# Altium PCB DifferentialProbe.PcbDoc (part 1 of 2)
Units mm, origin at the board's own origin, x right, y up, seen from the top; angles counter-clockwise.
Board outline 90 x 33 mm, 4 copper layers (Top Layer, Layer 1, Layer 2, Bottom Layer), stack 1.17 mm thick; 107 components, 44 nets, 239 pads, 207 vias.
Unrouted connection lines stored in the file: 3.
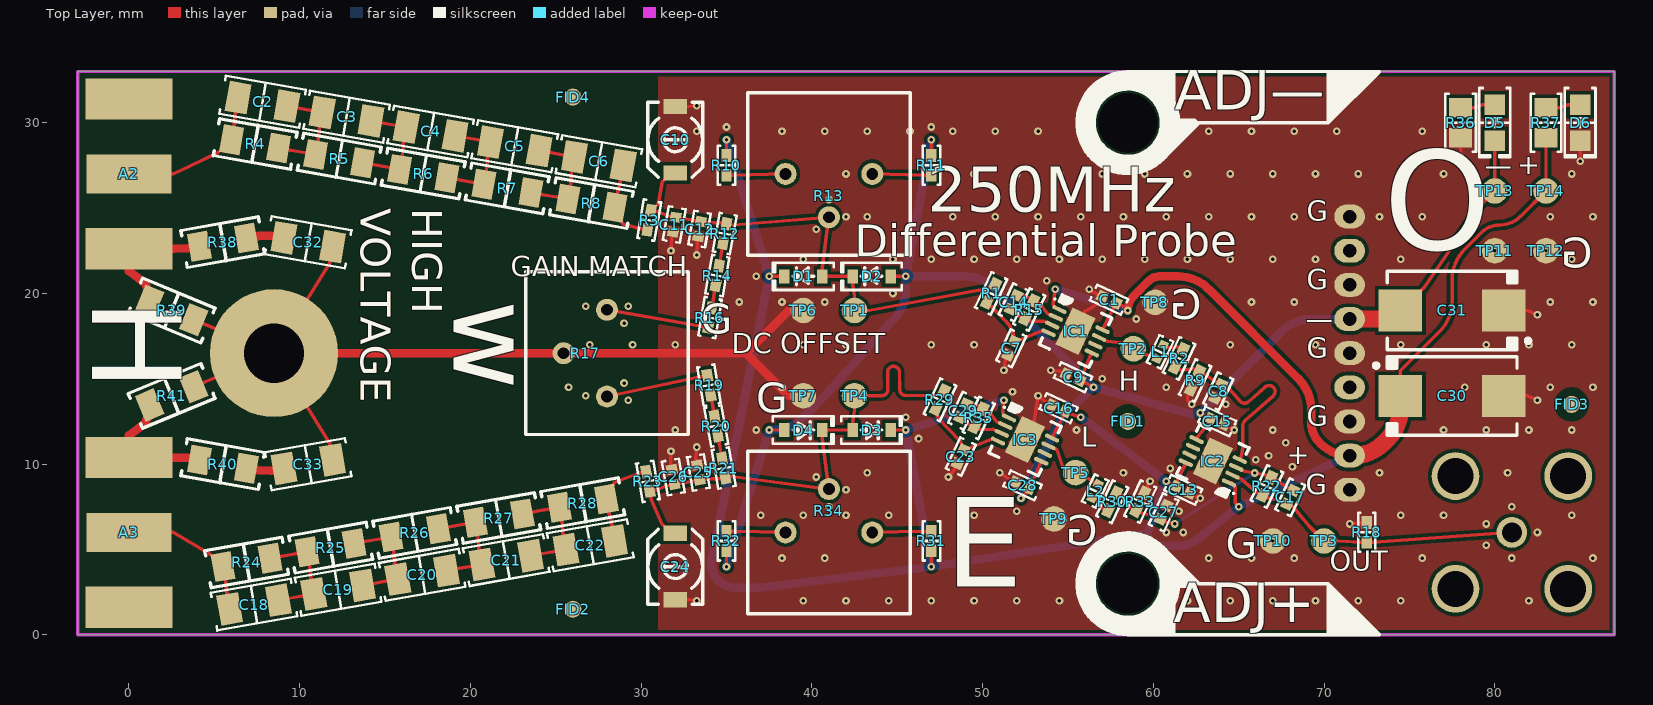
[diagram p0: Top Layer view]
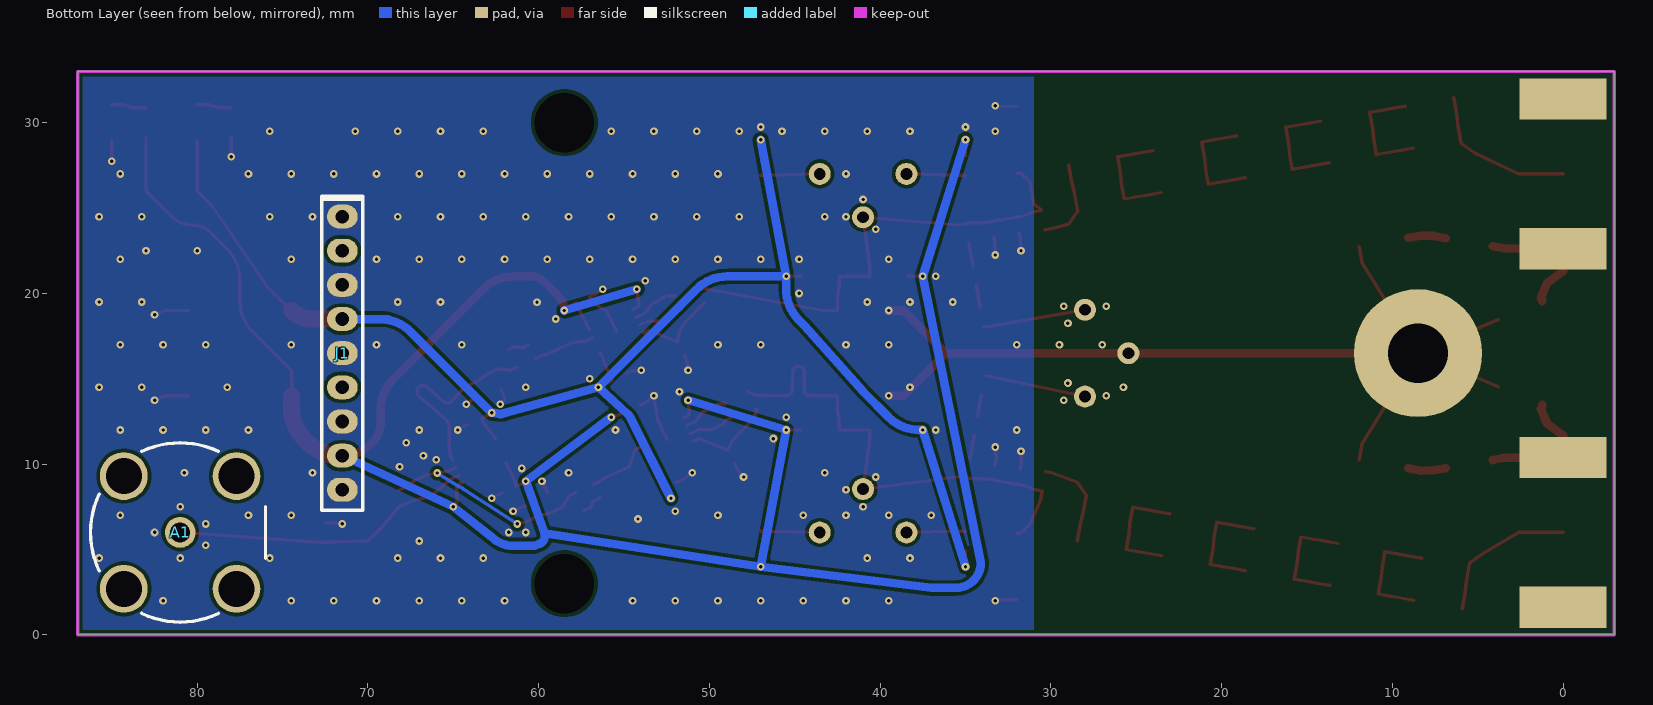
[diagram p1: Bottom Layer view, seen from below]
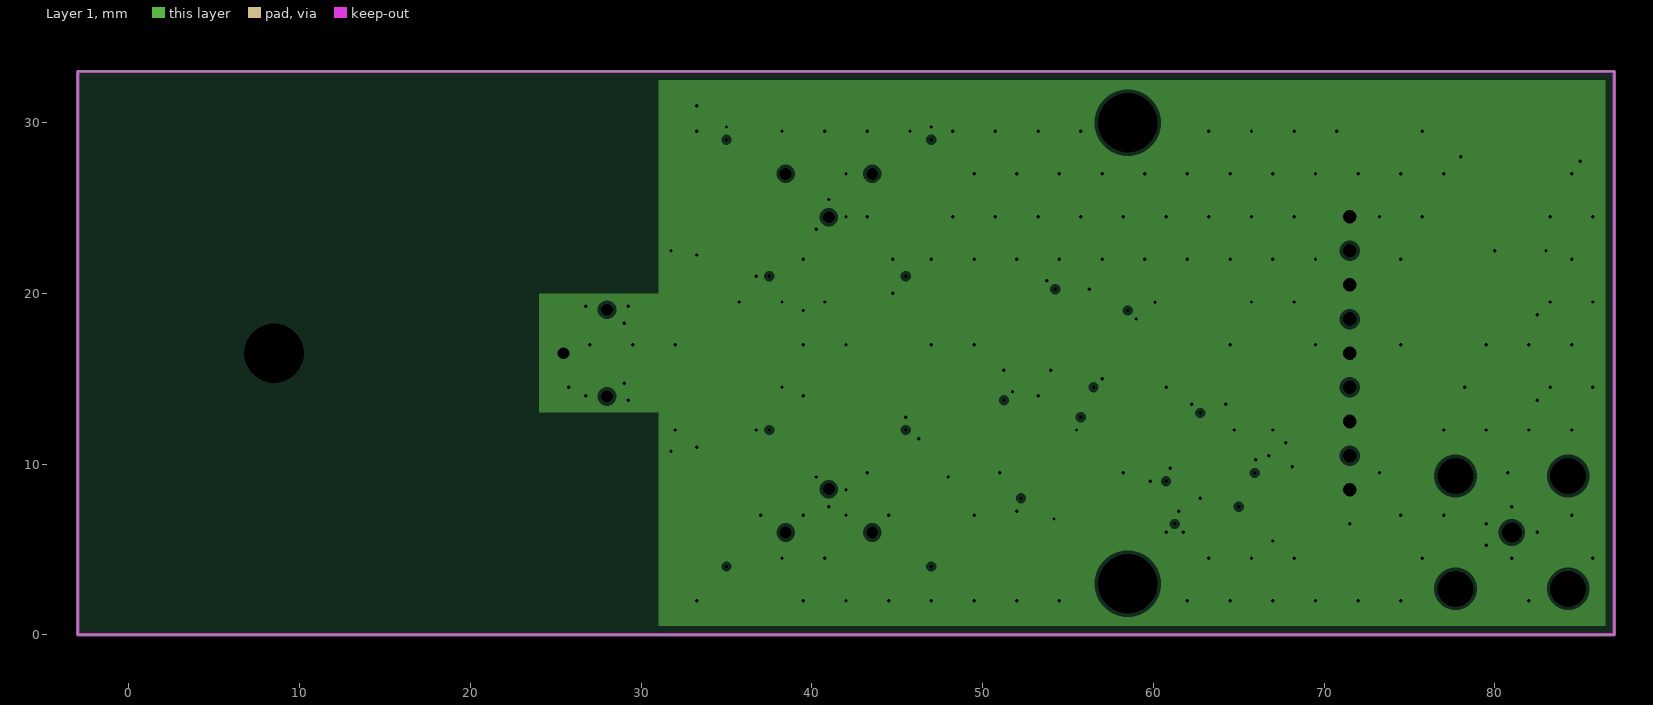
[diagram p2: Layer 1, clearances drawn from the general rule]
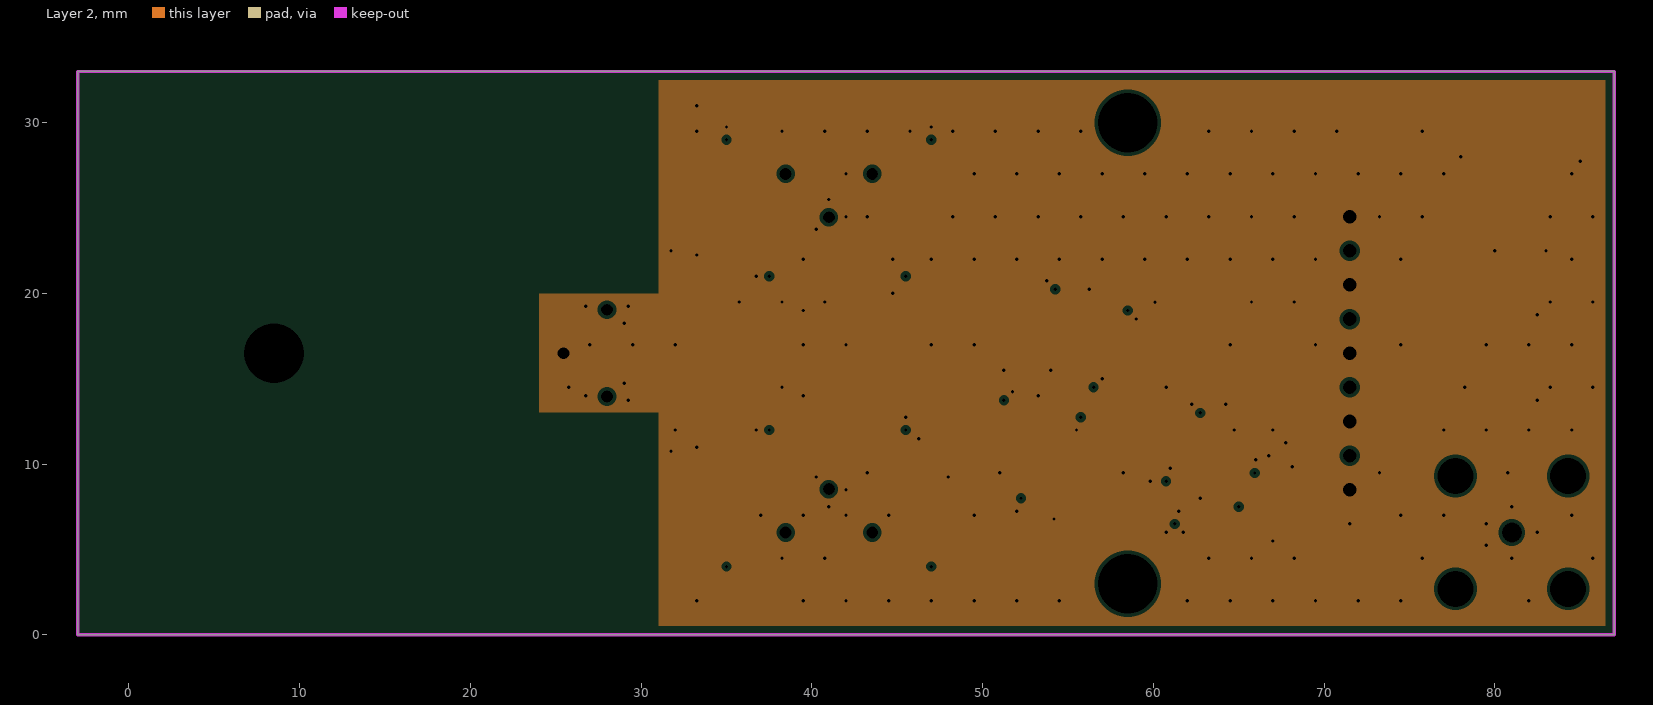
[diagram p3: Layer 2, clearances drawn from the general rule]

## Layer stack, top to bottom
Top Solder: solder mask 0.0102, Solder Resist, Dk 3.5
Top Layer: signal copper 0.035
Prepreg1: prepreg 0.2, PP-006, Dk 4.6
Layer 1: plane copper 0.0175, net GND
Core: dielectric 0.665, FR-4, Dk 4.6
Layer 2: plane copper 0.0175, net GND
Prepreg2: prepreg 0.2, PP-006, Dk 4.6
Bottom Layer: signal copper 0.035
Bottom Solder: solder mask 0.0102, Solder Resist, Dk 3.5

## Board outline
-3,0 87,0 87,33 -3,33

## Design rules (kind name [scope] priority, off if disabled: settings)
BoardOutlineClearance [All] p1: gap=0.25 ignorepadtopadclearanceinfootprint=FALSE
Clearance "Clearance GND Poly" [InPolygon] p1: gap=0.2 ignorepadtopadclearanceinfootprint=TRUE
Clearance [All] p2: gap=0.09 ignorepadtopadclearanceinfootprint=FALSE
HoleSize [All] p1: absolutevalues=TRUE maxlimit=5 minlimit=0.2 maxpercent=80.000 minpercent=20.000
MatchedLengths "MatchedLengths Output" [InNetClass('OutMatch')] p1: tolerance=25.4 checknetsindiffpair=FALSE checkdiffpairvsdiffpair=TRUE checkxsignals=TRUE checkothers=TRUE usedelayunits=TRUE delaytolerance=2.000000
MatchedLengths "MatchedLengths Input" [InNetClass('LengthMatch')] p2: tolerance=25.4 checknetsindiffpair=FALSE checkdiffpairvsdiffpair=TRUE checkxsignals=TRUE checkothers=TRUE usedelayunits=TRUE delaytolerance=2.000000
MinimumAnnularRing [All] p1: minimumring=0.125
MinimumSolderMaskSliver [All] p1: minsoldermaskwidth=0
PlaneClearance [All] p1: clearance=0.2
PlaneConnect [All] p1: planeconnectstyle=Direct reliefexpansion=0.508 reliefentries=4 reliefconductorwidth=0.254 reliefairgap=0.254
PolygonConnect [All] p1: connectstyle=Direct reliefconductorwidth=0.254 reliefentries=4 polygonreliefangle="90 Angle" airgapwidth=0.254
RoutingVias [All] p1: holewidth=0.35 width=0.65 viastyle="Through Hole" minholewidth=0.2 minwidth=0.45 maxholewidth=4 maxwidth=6.35
SMDEntry [All] p1: side=TRUE corner=TRUE anyangle=FALSE
SMDToCorner [All] p1: distance=39370
SilkToSilkClearance [All] p1: silktosilkclearance=-10
SolderMaskExpansion "SolderMask Via" [IsVia] p1: expansion=0.102 istentingtop=TRUE
SolderMaskExpansion [All] p2: expansion=0.102 istentingtop=FALSE
UnRoutedNet [All] p1: checkbadconnections=TRUE
Width [All] p1: maxlimit=3 minlimit=0.09 preferedwidth=0.2
24 further rules are at their usual default settings.

## Classes and differential pairs
net class OutMatch: NetC8_1 NetC17_1
net class LengthMatch: NetC10_1 NetC24_1
component class U_DifferentialProbe: C1 C2 C3 C4 C5 C6 C7 C8 C9 C10 C11 C12 C13 C14 C15 C16 C17 C18 C19 C20 C21 C22 C23 C24 C25 C26 C27 C28 C29 D1 D2 D3 D4 IC1 IC2 IC3 L1 L2 R1 R2 R3 R4 R5 R6 R7 R8 R9 R10 R11 R12 R13 R14 R15 R16 R17 R18 R19 R20 R21 R22 R23 R24 R25 R26 R27 R28 R29 R30 R31 R32 R33 R34 R35 TP1 TP2 TP3 TP4 TP5
component class "Probe Connections": A1 A2 A3 C30 C31 C32 C33 D5 D6 FID1 FID2 FID3 FID4 J1 R36 R37 R38 R39 R40 R41 TP6 TP7 TP8 TP9 TP10 TP11 TP12 TP13 TP14

## Components (designator, comment, footprint, x,y, rotation, side; value= is the part's Value field where it differs from the comment)
A1 "5413631-1" "TE 5413631-1" 81,6 r270 bottom
A2 "0732511290" "MOLEX SD-73251-129" -3,27 r180 top
A3 "0732511290" "MOLEX SD-73251-129" -3,6 r180 top
C1 "0.1 µF" "CAP 0402_1005" 57.41,19.628 r335 top
C2 "10 pF" "CAP 1206_3216 - 0.8MM" 7.826,31.221 r350 top
C3 "10 pF" "CAP 1206_3216 - 0.8MM" 12.75,30.353 r350 top
C4 "10 pF" "CAP 1206_3216 - 0.8MM" 17.674,29.485 r350 top
C5 "10 pF" "CAP 1206_3216 - 0.8MM" 22.598,28.617 r350 top
C6 "10 pF" "CAP 1206_3216 - 0.8MM" 27.522,27.748 r350 top
C7 "6.8pF" "CAP 0402_1005" 51.672,16.787 r65 top
C8 "0.8 pF" "CAP 0402_1005" 63.808,14.27 r245 top
C9 "0.1 µF" "CAP 0402_1005" 55.297,15.097 r155 top
C10 "JZ400" "KNOWLES JZ" 32,29 r90 top
C11 "470pF" "CAP 0402_1005" 31.946,24.03 r80 top
C12 "470pF" "CAP 0402_1005" 33.423,23.769 r80 top
C13 "0.1 µF" "CAP 0402_1005" 61.75,8.5 r155 top
C14 "0.25 pF" "CAP 0402_1005" 51.822,19.476 r65 top
C15 "0.1 µF" "CAP 0402_1005" 63.75,12.5 r335 top
C16 "0.1 µF" "CAP 0402_1005" 54.452,13.284 r335 top
C17 "0.8 pF" "CAP 0402_1005" 68.016,8.063 r245 top
C18 "10 pF" "CAP 1206_3216 - 0.8MM" 7.326,1.779 r10 top
C19 "10 pF" "CAP 1206_3216 - 0.8MM" 12.25,2.647 r10 top
C20 "10 pF" "CAP 1206_3216 - 0.8MM" 17.174,3.515 r10 top
C21 "10 pF" "CAP 1206_3216 - 0.8MM" 22.098,4.383 r10 top
C22 "10 pF" "CAP 1206_3216 - 0.8MM" 27.022,5.252 r10 top
C23 "6.8pF" "CAP 0402_1005" 48.714,10.443 r65 top
C24 "JZ400" "KNOWLES JZ" 32,4 r270 top
C25 "470pF" "CAP 0402_1005" 33.355,9.512 r280 top
C26 "470pF" "CAP 0402_1005" 31.877,9.252 r280 top
C27 "0.8 pF" "CAP 0402_1005" 60.599,7.176 r65 top
C28 "0.1 µF" "CAP 0402_1005" 52.339,8.753 r155 top
C29 "0.25 pF" "CAP 0402_1005" 48.864,13.131 r65 top
C30 "470µF" "CAP POL 2917_7343" 77.5,14 r0 top
C31 "470µF" "CAP POL 2917_7343" 77.5,19 r180 top
C32 "10pF" "CAP 1206_3216 - 1.0MM" 10.5,23 r170 top
C33 "10pF" "CAP 1206_3216 - 1.0MM" 10.5,10 r190 top
D1 "BAS316,115" SOD323 39.5,21 r180 top
D2 "BAS316,115" SOD323 43.5,21 r180 top
D3 "BAS316,115" SOD323 43.5,12 r0 top
D4 "BAS316,115" SOD323 39.5,12 r0 top
D5 "Green" "LED 0805_2012 GREEN" 80,30 r270 top
D6 "Green" "LED 0805_2012 GREEN" 85,30 r270 top
FID1 "Fiducial" Fiducial-1mm 58.5,12.5 r65 top
FID2 "Fiducial" Fiducial-1mm 26,1.5 r90 top
FID3 "Fiducial" Fiducial-1mm 84.5,13.5 r90 top
FID4 "Fiducial" Fiducial-1mm 26,31.5 r90 top
IC1 "ADA4817-1ACPZ-R7" "AD LFCSP-8 3x3MM CP-8-5" 55.448,17.785 r335 top
IC2 "ADA4817-1ACPZ-R7" "AD LFCSP-8 3x3MM CP-8-5" 63.485,10.176 r155 top
IC3 "ADA4817-1ACPZ-R7" "AD LFCSP-8 3x3MM CP-8-5" 52.489,11.441 r335 top
J1 "NRPN091PAEN-RC" "SULLINS NRPN091PAEN-RC" 71.5,16.5 r270 bottom
L1 "22 nH" "IND 0402_1005 RF WW" 60.402,16.578 r65 top
L2 "22 nH" "IND 0402_1005 RF WW" 56.598,8.422 r245 top
R1 "150 Ohms" "RES 0402_1005" 50.5,20 r245 top
R2 "348 Ohms" "RES 0402_1005" 61.511,16.194 r245 top
R3 "150 Ohms" "RES 0402_1005" 30.469,24.29 r80 top
R4 "1 MOhms" "RES 1206_3216" 7.391,28.759 r350 top
R5 "1 MOhms" "RES 1206_3216" 12.315,27.891 r350 top
R6 "1 MOhms" "RES 1206_3216" 17.24,27.023 r350 top
R7 "1 MOhms" "RES 1206_3216" 22.164,26.155 r350 top
R8 "1 MOhms" "RES 1206_3216" 27.088,25.286 r350 top
R9 "348 Ohms" "RES 0402_1005" 62.448,14.904 r245 top
R10 "15 kOhms" "RES 0402_1005" 35,27.5 r270 top
R11 "15 kOhms" "RES 0402_1005" 47,27.5 r90 top
R12 "9.1 kOhms" "RES 0402_1005" 34.9,23.509 r80 top
R13 "1 MOhms" "BOURNS TRIMPOT 3386P-1" 41,27 r0 top
R14 "845 Ohms" "RES 0402_1005" 34.466,21.047 r80 top
R15 "470 Ohms" "RES 0402_1005" 52.729,19.053 r65 top
R16 "24.9 Ohms" "RES 0402_1005" 34.032,18.585 r80 top
R17 "100 Ohms" "BOURNS TRIMPOT 3386P-1" 28,16.5 r270 top
R18 "1 kOhms" "RES 0402_1005" 72.5,6 r270 top
R19 "24.9 Ohms" "RES 0402_1005" 33.977,14.623 r280 top
R20 "845 Ohms" "RES 0402_1005" 34.398,12.235 r280 top
R21 "9.1 kOhms" "RES 0402_1005" 34.832,9.773 r280 top
R22 "348 Ohms" "RES 0402_1005" 66.657,8.696 r245 top
R23 "150 Ohms" "RES 0402_1005" 30.4,8.991 r280 top
R24 "1 MOhms" "RES 1206_3216" 6.891,4.241 r10 top
R25 "1 MOhms" "RES 1206_3216" 11.815,5.109 r10 top
R26 "1 MOhms" "RES 1206_3216" 16.74,5.977 r10 top
R27 "1 MOhms" "RES 1206_3216" 21.664,6.845 r10 top
R28 "1 MOhms" "RES 1206_3216" 26.588,7.714 r10 top
R29 "150 Ohms" "RES 0402_1005" 47.505,13.765 r245 top
R30 "348 Ohms" "RES 0402_1005" 57.591,7.802 r65 top
R31 "15 kOhms" "RES 0402_1005" 47,5.5 r90 top
R32 "15 kOhms" "RES 0402_1005" 35,5.5 r270 top
R33 "348 Ohms" "RES 0402_1005" 59.24,7.81 r65 top
R34 "1 MOhms" "BOURNS TRIMPOT 3386P-1" 41,6 r180 top
R35 "470 Ohms" "RES 0402_1005" 49.77,12.709 r65 top
R36 "390 Ohms" "RES 0805_2012" 78,30 r270 top
R37 "390 Ohms" "RES 0805_2012" 83,30 r270 top
R38 "0 Ohms" "RES 1206_3216" 5.5,23 r190 top
R39 "0 Ohms" "RES 1206_3216" 2.5,19 r157.5 top
R40 "0 Ohms" "RES 1206_3216" 5.5,10 r170 top
R41 "0 Ohms" "RES 1206_3216" 2.5,14 r202.5 top
TP1 "Test Point" TestPoint-1.5mm 42.5,19 r0 top
TP2 "Test Point" TestPoint-1.5mm 58.831,16.759 r65 top
TP3 "Test Point" TestPoint-1.5mm 70,5.5 r65 top
TP4 "Test Point" TestPoint-1.5mm 42.5,14 r90 top
TP5 "Test Point" TestPoint-1.5mm 55.45,9.509 r65 top
TP6 "Test Point" TestPoint-1.5mm 39.5,19 r90 top
TP7 "Test Point" TestPoint-1.5mm 39.5,14 r90 top
TP8 "Test Point" TestPoint-1.5mm 60.099,19.478 r65 top
TP9 "Test Point" TestPoint-1.5mm 54.182,6.79 r65 top
TP10 "Test Point" TestPoint-1.5mm 67,5.5 r0 top
TP11 "Test Point" TestPoint-1.5mm 80,22.5 r90 top
TP12 "Test Point" TestPoint-1.5mm 83,22.5 r90 top
TP13 "Test Point" TestPoint-1.5mm 80,26 r90 top
TP14 "Test Point" TestPoint-1.5mm 83,26 r90 top

## Footprints (in the part's own frame and the unit in brackets; to place one, negate y for a bottom-side part, rotate by r counter-clockwise, add the part's x,y. Pads: shape width x height; smd on the part's side, far side on the other; paste and mask are expansions set on the pad)
"AD LFCSP-8 3x3MM CP-8-5" [mm] "SON, 8-Leads, Body 3.00x3.00mm, Pitch 0.50mm, Thermal Pad 2.36x1.49mm, IPC Medium Density"
  oval 0.9x0.25 smd: 1(-1.395,0.75) 2(-1.395,0.25) 3(-1.395,-0.25) 4(-1.395,-0.75) 5(1.395,-0.75) 6(1.395,-0.25) 7(1.395,0.25) 8(1.395,0.75)
  rect 1.49x2.36 smd: 9(0,0)
  silkscreen extent -1.95,-1.6 1.6,1.6, body extent -1.57,-1.55 1.57,1.55, height 0.8
"BOURNS TRIMPOT 3386P-1" [mm] "3386 - 3/8 ? Square Trimpot® Trimming Potentiometer"
  round 1.29 hole 0.69: 1(-2.54,0) 2(0,-2.54) 3(2.54,0)
  silkscreen extent -4.76,-4.76 4.76,4.76, body extent -4.79,-4.79 4.79,4.79, height 4.95
"CAP 0402_1005" [mm] "Chip Capacitor, 2-Leads, Body 1.02x0.51mm, IPC Medium Density"
  rect 0.6x0.64 smd: 1(-0.44,0) 2(0.44,0)
  silkscreen extent -1,-0.5 1,0.5, body extent -0.5,-0.26 0.5,0.26, height 0.52
"CAP 1206_3216 - 0.8MM" [mm] "Chip Capacitor, 2-Leads, Body 3.25x1.60mm, IPC Medium Density"
  rect 1.3x1.8 smd: 1(-1.45,0) 2(1.45,0)
  silkscreen extent -2.37,-1.13 2.38,1.12, body extent -1.6,-0.8 1.6,0.8, height 0.8
"CAP 1206_3216 - 1.0MM" [mm] "Chip Capacitor, 2-Leads, Body 3.25x1.60mm, IPC Medium Density"
  rect 1.3x1.8 smd: 1(-1.45,0) 2(1.45,0)
  silkscreen extent -2.38,-1.13 2.37,1.13, body extent -1.6,-0.8 1.6,0.8, height 1
"CAP POL 2917_7343" [mm] "Molded Capacitor, 2-Leads, Body 7.30x4.30mm, IPC Medium Density"
  rect 2.55x2.45 smd: 1(-3.025,0) 2(3.025,0)
  silkscreen extent -4.57,-2.3 3.8,2.3, body extent -3.65,-2.15 3.65,2.15, height 4.1
Fiducial-1mm [mm]
  round 1 smd paste-1 mask+0.5: F(0,0)
  Top Layer pour cut-out: -1,0 -0.924,0.383 -0.707,0.707 -0.383,0.924 0,1 0,1 0.383,0.924 0.707,0.707 0.924,0.383 1,0 1,0 0.924,-0.383 0.707,-0.707 0.383,-0.924 0,-1 0,-1 -0.383,-0.924 -0.707,-0.707 -0.924,-0.383 -1,0
"IND 0402_1005 RF WW" [mm] "Chip Inductor, 2-Leads, Body 1.00x0.50mm, IPC High Density"
  rect 0.48x0.54 smd: 1(-0.44,0) 2(0.44,0)
  silkscreen extent -0.88,-0.45 0.88,0.45, body extent -0.5,-0.29 0.5,0.29, height 0.51
"KNOWLES JZ" [mm] "CAP TRIMMER"
  rect 0.9x1.4 smd: 1(-1.95,0) 2(1.95,0)
  silkscreen extent -2.2,-1.6 2.2,1.6, body extent -2.25,-1.6 2.25,1.6, height 1.45
"LED 0805_2012 GREEN" [mm] "Chip Diode, 2-Leads, Body 2.00x1.25mm, IPC Medium Density"
  rect 1.2x1.2 smd: 1(-1.05,0) 2(1.05,0)
  silkscreen extent -2.03,-0.9 2.03,0.9, body extent -1,-0.62 1,0.63, height 0.9
"MOLEX SD-73251-129" [mm]
  rect 5.08x2.415 smd: G(-3,4.383) G(-3,-4.383)
  rect 5.08x2.415 smd far side: G(-3,4.383) G(-3,-4.383)
  rect 5x2.29 smd: S(-3,0)
  body extent -4.75,-4.76 12.7,4.77, height 4.36
"RES 0402_1005" [mm] "Chip Resistor, 2-Leads, Body 1.0x0.5mm, IPC Medium Density"
  rect 0.75x0.6 smd: 1(-0.575,0) 2(0.575,0)
  silkscreen extent -1.14,-0.51 1.14,0.51, body extent -0.5,-0.25 0.5,0.25, height 0.35
"RES 0805_2012" [mm] "Chip Resistor, 2-Leads, Body 2.00x1.25mm, IPC Medium Density"
  rect 1.15x1.35 smd: 1(-0.875,0) 2(0.875,0)
  silkscreen extent -1.7,-0.9 1.7,0.9, body extent -1,-0.62 1,0.63, height 0.6
"RES 1206_3216" [mm] "Chip Resistor, 2-Leads, Body 3.13x1.55mm, IPC Medium Density"
  rect 1.2x1.65 smd: 1(-1.4,0) 2(1.4,0)
  silkscreen extent -2.3,-1.1 2.3,1.1, body extent -1.6,-0.8 1.6,0.8, height 0.6
SOD323 [mm] "SOD, 2-Leads, Body 1.25x2.50mm, IPC Medium Density"
  rect 0.625x0.83 smd: 1(-1.112,0) 2(1.112,0)
  silkscreen extent -1.78,-0.8 1.78,0.8, body extent -1.36,-0.62 1.36,0.62, height 1.05
"SULLINS NRPN091PAEN-RC" [mm]
  oval 1.4x1.8 hole 0.8: 1(-8,0) 2(-6,0) 3(-4,0) 4(-2,0) 5(0,0) 6(2,0) 7(4,0) 8(6,0) 9(8,0)
  silkscreen extent -9.2,-1.2 9.2,1.2, body extent -9,-1 9,1, height 5.6
"TE 5413631-1" [mm] "CONN BNC JACK R/A 50 OHM PCB"
  round 2.8 hole 2.11: G(-3.3,-3.3) G(-3.3,3.3) G(3.3,-3.3) G(3.3,3.3)
  round 1.8 hole 1.17: S(0,0)
  silkscreen extent -5.25,-5.25 5.25,5, body extent -5.26,-22.63 5.26,5, height 11.66
TestPoint-1.5mm [mm]
  round 1.5 smd: 1(0,0)

## Part data
A1: "CONN BNC JACK R/A 50 OHM PCB", Frequency - Max="4 GHz", Housing Color=Silver, Manufacturer="TE Connectivity AMP Connectors", Supplier Part Number 1=A32270-ND, ComponentLink1Description=Datasheet, ComponentLink1URL=https://www.te.com/commerce/DocumentDelivery/DDEController?Action=srchrtrv&DocNm=1307191_BNC_Connectors&DocType=CS&DocLang=English, ComponentLink2Description="DigiKey Link", ComponentLink2URL=https://www.digikey.com/en/products/detail/te-connectivity-amp-connectors/5413631-1/811168, Connector Style=BNC, Connector Type="Jack, Female Socket", Contact Termination=Solder, Fastening Type="Bayonet Lock", Impedance=50Ohm, LastUpdated="29/06/2022 18:00:52", Lifecycle Status=Active, Minimum Order=1, Mounting Type="Through Hole, Right Angle", Number of Ports=1, Packaging=Bulk, Part Number=5413631-1, Part Status=Active, Price=5.77, Series=-, Shield Termination=Solder, Supplier 1=DigiKey
A2 A3: "CONN SMA JACK STR 50OHM EDGE MNT", Frequency - Max="18 GHz", Housing Color=Gold, Manufacturer=Molex, Supplier Part Number 1=WM9461-ND, ComponentLink1Description=Datasheet, ComponentLink1URL=https://www.molex.com/pdm_docs/ps/PS-89675-346.pdf, ComponentLink2Description="DigiKey Link", ComponentLink2URL=https://www.digikey.com/en/products/detail/molex/0732511290/3878247, Connector Style=SMA, Connector Type="Jack, Female Socket", Contact Termination=Solder, Fastening Type=Threaded, Impedance=50Ohm, LastUpdated="29/06/2022 18:07:55", Lifecycle Status=Active, Minimum Order=1, Mounting Feature="Bulkhead - Front Side Nut", Mounting Type="Board Edge, End Launch; Panel Mount", Number of Ports=1, Packaging=Tray, Part Number=0732511290, Part Status=Active, Price=4.46, Series=73251, Shield Termination=Solder, Supplier 1=DigiKey
C1 C9 C13 C15 C16 C28: library part 0402B104K100CT, "CAP CER 0.1UF 10V X7R 0402", Device Package="0402 (1005 Metric)", Manufacturer="Walsin Technology Corporation", Operating Temperature="-55°C ~ 125°C", Supplier Part Number 1=1292-1629-1-ND, Temperature Coefficient=X7R, Tolerance=±10%, Voltage - Rated=10V, Applications="General Purpose", Capacitance="0.1 µF", ComponentLink1Description=Datasheet, ComponentLink1URL=http://www.passivecomponent.com/wp-content/uploads/2018/10/MLCC.pdf, ComponentLink2Description="DigiKey Link", ComponentLink2URL=https://www.digikey.com/en/products/detail/walsin-technology-corporation/0402B104K100CT/6707533, LastUpdated="28/06/2022 16:55:03", Lifecycle Status=Active, Minimum Order=1, Mounting Type="Surface Mount, MLCC", Package / Case="0402 (1005 Metric)", Packaging=TapeAndReel, Part Number=0402B104K100CT, Part Status=Active, PartId=38949, Price=0.01, Series=-, Size / Dimension="0.039\" L x 0.020\" W (1.00mm x 0.50mm)", Supplier 1=DigiKey, Thickness (Max)="0.022\" (0.55mm)"
C2 C3 C4 C5 C6 C18 C19 C20 C21 C22: library part CC1206JRNPOBBN100, "CAP CER 10PF 500V C0G/NPO 1206", Device Package="1206 (3216 Metric)", Manufacturer=Yageo, Operating Temperature="-55°C ~ 125°C", Supplier Part Number 1=311-4431-1-ND, Temperature Coefficient="C0G, NP0", Tolerance=±5%, Voltage - Rated=500V, Applications="General Purpose", Capacitance="10 pF", ComponentLink1Description=Datasheet, ComponentLink1URL=http://www.yageo.com/documents/recent/UPY-NP0X7R_MV_100-to-630V_21.pdf, ComponentLink2Description="DigiKey Link", ComponentLink2URL=https://www.digikey.com/en/products/detail/yageo/CC1206JRNPOBBN100/5884499, LastUpdated="27/06/2022 11:07:55", Lifecycle Status=Active, Minimum Order=1, Mounting Type="Surface Mount, MLCC", Package / Case="1206 (3216 Metric)", Packaging=TapeAndReel, Part Number=CC1206JRNPOBBN100, Part Status=Active, PartId=18815, Price=0.04, Series=CC, Size / Dimension="0.126\" L x 0.063\" W (3.20mm x 1.60mm)", Supplier 1=DigiKey, Thickness (Max)="0.028\" (0.70mm)"
C7 C23: library part 04025U6R8BAT2A, "CAP CER 6.8PF 50V NP0 0402", Device Package="0402 (1005 Metric)", Manufacturer="AVX Corporation", Operating Temperature="-55°C ~ 125°C", Supplier Part Number 1=478-10165-1-ND, Temperature Coefficient="C0G, NP0", Tolerance=±0.1pF, Voltage - Rated=50V, Applications="RF, Microwave, High Frequency", Capacitance=6.8pF, ComponentLink1Description=Datasheet, ComponentLink1URL=http://datasheets.avx.com/U-Series.pdf, ComponentLink2Description="DigiKey Link", ComponentLink2URL=http://digikey.com/product-detail/en/avx-corporation/04025U6R8BAT2A/478-10165-1-ND/6797183, Features="Ultra Low ESR", LastUpdated="08/02/2022 12:26:50", Lifecycle Status=Active, Minimum Order=1, Mounting Type="Surface Mount, MLCC", Package / Case="0402 (1005 Metric)", Packaging=TapeAndReel, Part Number=04025U6R8BAT2A, Part Status=Active, PartId=6872, Price=0.03, Series=U, Size / Dimension="0.039\" L x 0.020\" W (1.00mm x 0.50mm)", Supplier 1=DigiKey, Thickness (Max)="0.022\" (0.55mm)"
C8 C27: library part CBR04C808C5GAC, "CAP CER 0.8PF 50V C0G/NP0 0402", Device Package="0402 (1005 Metric)", Manufacturer=KEMET, Operating Temperature="-55°C ~ 125°C", Supplier Part Number 1=399-6160-1-ND, Temperature Coefficient="C0G, NP0", Tolerance=±0.25pF, Voltage - Rated=50V, Applications="RF, Microwave, High Frequency", Capacitance="0.8 pF", ComponentLink1Description=Datasheet, ComponentLink1URL=https://api.kemet.com/component-edge/download/datasheet/CBR04C808C5GAC.pdf, ComponentLink2Description="DigiKey Link", ComponentLink2URL=https://www.digikey.com/en/products/detail/kemet/CBR04C808C5GAC/2732303, Features="High Q, Low Loss, Ultra Low ESR", LastUpdated="28/06/2022 16:55:23", Lifecycle Status=Active, Minimum Order=1, Mounting Type="Surface Mount, MLCC", Package / Case="0402 (1005 Metric)", Packaging=TapeAndReel, Part Number=CBR04C808C5GAC, Part Status=Active, PartId=39017, Price=0.01, Series="CBR-SMD RF C0G", Size / Dimension="0.039\" L x 0.020\" W (1.00mm x 0.50mm)", Supplier 1=DigiKey, Thickness (Max)="0.022\" (0.55mm)"
C10 C24: "CAP TRIMMER 8-40PF 125V SMD", Capacitance Range="8 ~ 40pF", Dielectric Material=Ceramic, Manufacturer="Knowles Voltronics", Operating Temperature="-40°C ~ 85°C", Q @ Freq="1500 @ 1MHz", Supplier Part Number 1=1674-1006-1-ND, Adjustment Type=Top, ComponentLink1Description=Datasheet, ComponentLink1URL=https://www.knowlescapacitors.com/getattachment/4e3ef37f-1910-4b01-89e4-302e57c70f90/JZ-Series.aspx, ComponentLink2Description="DigiKey Link", ComponentLink2URL=https://www.digikey.com/en/products/detail/knowles-voltronics/JZ400/6021623, Features="General Purpose", Height - Seated (Max)="0.057\" (1.45mm)", LastUpdated="29/06/2022 15:30:24", Lifecycle Status=Active, Minimum Order=1, Mounting Type="Surface Mount", Packaging=TapeAndReel, Part Number=JZ400, Part Status=Active, Price=1.51, Series=JZ, Size / Dimension="0.177\" L x 0.126\" W (4.50mm x 3.20mm)", Supplier 1=DigiKey
C11 C12 C25 C26: library part 04025A471JAT2A, "CAP CER 470PF 50V C0G/NP0 0402", Device Package="0402 (1005 Metric)", Manufacturer="AVX Corporation", Operating Temperature="-55°C ~ 125°C", Supplier Part Number 1=478-7880-1-ND, Temperature Coefficient="C0G, NP0", Tolerance=±5%, Voltage - Rated=50V, Applications="General Purpose", Capacitance=470pF, ComponentLink1Description=Datasheet, ComponentLink1URL=http://datasheets.avx.com/C0GNP0-Dielectric.pdf, ComponentLink2Description="DigiKey Link", ComponentLink2URL=http://digikey.com/product-detail/en/avx-corporation/04025A471JAT2A/478-7880-1-ND/3881503, LastUpdated="08/02/2022 12:26:47", Lifecycle Status=Active, Minimum Order=1, Mounting Type="Surface Mount, MLCC", Package / Case="0402 (1005 Metric)", Packaging=TapeAndReel, Part Number=04025A471JAT2A, Part Status=Active, PartId=8853, Price=0.01, Series=-, Size / Dimension="0.039\" L x 0.020\" W (1.00mm x 0.50mm)", Supplier 1=DigiKey, Thickness (Max)="0.022\" (0.55mm)"
C14 C29: library part GCQ1555C1HR25BB01D, "CAP CER 0.25PF 50V C0G/NP0 0402", Device Package="0402 (1005 Metric)", Manufacturer="Murata Electronics", Operating Temperature="-55°C ~ 125°C", Ratings=AEC-Q200, Supplier Part Number 1=490-17543-1-ND, Temperature Coefficient="C0G, NP0", Tolerance=±0.1pF, Voltage - Rated=50V, Applications="RF, Microwave, High Frequency, Automotive", Capacitance="0.25 pF", ComponentLink1Description=Datasheet, ComponentLink1URL=https://search.murata.co.jp/Ceramy/image/img/A01X/G101/ENG/GCQ1555C1HR25BB01-01.pdf, ComponentLink2Description="DigiKey Link", ComponentLink2URL=https://www.digikey.com/en/products/detail/murata-electronics/GCQ1555C1HR25BB01D/7803249, LastUpdated="28/06/2022 16:54:55", Lifecycle Status=Active, Minimum Order=1, Mounting Type="Surface Mount, MLCC", Package / Case="0402 (1005 Metric)", Packaging=TapeAndReel, Part Number=GCQ1555C1HR25BB01D, Part Status=Active, PartId=13204, Price=0.05, Series=GCQ, Size / Dimension="0.039\" L x 0.020\" W (1.00mm x 0.50mm)", Supplier 1=DigiKey, Thickness (Max)="0.022\" (0.55mm)"
C17: library part CC0402BRNPO9BNR80, "CAP CER 0.8PF 50V C0G/NPO 0402", Device Package="0402 (1005 Metric)", Manufacturer=Yageo, Operating Temperature="-55°C ~ 125°C", Supplier Part Number 1=311-3711-1-ND, Temperature Coefficient="C0G, NP0", Tolerance=±0.1pF, Voltage - Rated=50V, Applications="General Purpose", Capacitance="0.8 pF", ComponentLink1Description=Datasheet, ComponentLink1URL=https://www.yageo.com/upload/media/product/productsearch/datasheet/mlcc/UPY-GP_NP0_16V-to-50V_17.pdf, ComponentLink2Description="DigiKey Link", ComponentLink2URL=https://www.digikey.com/en/products/detail/yageo/CC0402BRNPO9BNR80/5883200, LastUpdated="28/06/2022 16:55:12", Lifecycle Status=Active, Minimum Order=1, Mounting Type="Surface Mount, MLCC", Package / Case="0402 (1005 Metric)", Packaging=TapeAndReel, Part Number=CC0402BRNPO9BNR80, Part Status=Active, PartId=8101, Price=0.01, Series=CC, Size / Dimension="0.039\" L x 0.020\" W (1.00mm x 0.50mm)", Supplier 1=DigiKey, Thickness (Max)="0.022\" (0.55mm)"
C30 C31: library part TPSE477K010R0100, "CAP TANT 470UF 10% 10V 2917", Device Package="2917 (7343 Metric)", ESR (Equivalent Series Resistance)=100mOhm, Manufacturer="AVX Corporation", Manufacturer Size Code=E, Operating Temperature="-55°C ~ 125°C", Supplier Part Number 1=478-1807-1-ND, Tolerance=±10%, Voltage - Rated=10V, Capacitance=470µF, ComponentLink1Description=Datasheet, ComponentLink1URL=http://datasheets.avx.com/TPS.pdf, ComponentLink2Description="DigiKey Link", ComponentLink2URL=http://digikey.com/product-detail/en/avx-corporation/TPSE477K010R0100/478-1807-1-ND/564839, Features="General Purpose", Height - Seated (Max)="0.169\" (4.30mm)", LastUpdated="02/09/2020 01:16:18", Lifecycle Status=Active, Minimum Order=1, Mounting Type="Surface Mount", Package / Case="2917 (7343 Metric)", Packaging=TapeAndReel, Part Number=TPSE477K010R0100, Part Status=Active, PartId=1906, Price=1.10, Series=TPS, Size / Dimension="0.287\" L x 0.169\" W (7.30mm x 4.30mm)", Supplier 1=DigiKey, Type=Molded
C32 C33: library part 1206GA100JAT2A, "CAP CER 10PF 2KV C0G/NP0 1206", Device Package="1206 (3216 Metric)", Manufacturer="AVX Corporation", Operating Temperature="-55°C ~ 125°C", Supplier Part Number 1=478-10697-1-ND, Temperature Coefficient="C0G, NP0", Tolerance=±5%, Voltage - Rated="2000V (2kV)", Applications="General Purpose", Capacitance=10pF, ComponentLink1Description=Datasheet, ComponentLink1URL=http://datasheets.avx.com/AVX-HV_MLCC.pdf, ComponentLink2Description="DigiKey Link", ComponentLink2URL=http://digikey.com/product-detail/en/avx-corporation/1206GA100JAT2A/478-10697-1-ND/7536569, Features="High Voltage", LastUpdated="02/09/2020 01:05:04", Lifecycle Status=Active, Minimum Order=1, Mounting Type="Surface Mount, MLCC", Package / Case="1206 (3216 Metric)", Packaging=TapeAndReel, Part Number=1206GA100JAT2A, Part Status=Active, PartId=19364, Price=0.29, Series=-, Size / Dimension="0.130\" L x 0.063\" W (3.30mm x 1.60mm)", Supplier 1=DigiKey, Thickness (Max)="0.037\" (0.94mm)"
D1 D2 D3 D4: "DIODE GEN PURP 100V 250MA SOD323", Capacitance @ Vr, F="1.5pF @ 0V, 1MHz", Current - Average Rectified (Io)="250mA (DC)", Current - Reverse Leakage @ Vr="500 nA @ 80 V", Manufacturer="Nexperia USA Inc.", Operating Temperature - Junction="150°C (Max)", Package / Case="SC-76, SOD-323", Supplier Device Package=SOD-323, Supplier Part Number 1=1727-4309-1-ND, Voltage - DC Reverse (Vr) (Max)="100 V", Voltage - Forward (Vf) (Max) @ If="1.25 V @ 150 mA", ComponentLink1Description=Datasheet, ComponentLink1URL=https://assets.nexperia.com/documents/data-sheet/BAS16_SER.pdf, ComponentLink2Description="DigiKey Link", ComponentLink2URL=https://www.digikey.com/en/products/detail/nexperia-usa-inc/BAS316-115/1232076, Diode Type=Standard, LastUpdated="30/06/2022 23:02:29", Lifecycle Status=Active, Minimum Order=1, Mounting Type="Surface Mount", Packaging=TapeAndReel, Part Number=BAS316,115, Part Status=Active, PartId=3004, Price=0.02, Reverse Recovery Time (trr)="4 ns", Series="Automotive, AEC-Q101, BAS16", Speed="Fast Recovery =< 500ns, > 200mA (Io)", Supplier 1=DigiKey
D5 D6: library part APHCM2012CGCK-F01, "LED GREEN CLEAR CHIP SMD", Current - Test=20mA, Device Package="0805 (2012 Metric)", Lens Color=Colorless, Manufacturer=Kingbright, Millicandela Rating=50mcd, Supplier Device Package="Chip LED", Supplier Part Number 1=754-1094-1-ND, Voltage - Forward (Vf) (Typ)=2.1V, Color=Green, ComponentLink1Description=Datasheet, ComponentLink1URL=http://www.kingbrightusa.com/images/catalog/SPEC/APHCM2012CGCK-F01.pdf, ComponentLink2Description="DigiKey Link", ComponentLink2URL=https://www.digikey.com/en/products/detail/kingbright/APHCM2012CGCK-F01/1747492, Configuration=Standard, Height (Max)=0.40mm, LastUpdated="20/06/2022 12:31:45", Lens Size="1.30mm x 1.25mm", Lens Style="Rectangle with Flat Top", Lens Transparency=Clear, Lifecycle Status=Active, Minimum Order=1, Mounting Type="Surface Mount", Package / Case="0805 (2012 Metric)", Packaging=TapeAndReel, Part Number=APHCM2012CGCK-F01, Part Status=Active, PartId=241, Price=0.06, Series=-, Size / Dimension="2.00mm L x 1.25mm W", Supplier 1=DigiKey, Viewing Angle=110°, Wavelength - Dominant=570nm, Wavelength - Peak=574nm
FID1 FID2 FID3 FID4: library part CMP-002-000000-1, Component Type=Standard, Design Item ID=Fiducial, Pin Count=0, Source=Fiducial.SchLib
IC1 IC2 IC3: "IC OPAMP VFB 1 CIRCUIT 8LFCSP", Current - Input Bias="2 pA", Current - Output / Channel="40 mA", Current - Supply=19mA, Manufacturer="Analog Devices Inc.", Operating Temperature="-40°C ~ 105°C", Package / Case="8-WFDFN Exposed Pad, CSP", Supplier Device Package="8-LFCSP (3x3)", Supplier Part Number 1=505-ADA4817-1ACPZ-R7CT-ND, Voltage - Input Offset="400 µV", Voltage - Supply, Single/Dual (±)="5V ~ 10V, ±2.5V ~ 5V", -3db Bandwidth="1.05 GHz", Amplifier Type="Voltage Feedback", ComponentLink1Description=Datasheet, ComponentLink1URL=https://www.analog.com/media/en/technical-documentation/data-sheets/ADA4817-1_4817-2.pdf, ComponentLink2Description="DigiKey Link", ComponentLink2URL=https://www.digikey.com/en/products/detail/analog-devices-inc/ADA4817-1ACPZ-R7/1979396, Gain Bandwidth Product="410 MHz", LastUpdated="28/06/2022 17:22:42", Lifecycle Status=Active, Minimum Order=1, Mounting Type="Surface Mount", Number of Circuits=1, Packaging=TapeAndReel, Part Number=ADA4817-1ACPZ-R7, Part Status=Active, PartId=46, Price=4.88, Series=FastFET™, Slew Rate=870V/µs, Supplier 1=DigiKey
J1: "CONN HEADER VERT 9POS 2MM", Current Rating (Amps)=2A, Insulation Color=Black, Manufacturer="Sullins Connector Solutions", Material Flammability Rating="UL94 V-0", Operating Temperature="-40°C ~ 105°C", Supplier Part Number 1=S5800-09-ND, ComponentLink1Description=Datasheet, ComponentLink1URL=https://drawings-pdf.s3.amazonaws.com/10531.pdf, ComponentLink2Description="DigiKey Link", ComponentLink2URL=https://www.digikey.com/en/products/detail/sullins-connector-solutions/NRPN091PAEN-RC/804922, Connector Type=Header, Contact Finish - Mating=Gold, Contact Finish - Post=Gold, Contact Finish Thickness - Mating=Flash, Contact Length - Mating="0.141\" (3.60mm)", Contact Length - Post="0.110\" (2.79mm)", Contact Material=Brass, Contact Shape=Square, Contact Type="Male Pin", Fastening Type=Push-Pull, Insulation Height="0.079\" (2.00mm)", Insulation Material="Polyamide (PA6T), Nylon 6T", LastUpdated="29/06/2022 18:29:44", Lifecycle Status=Active, Minimum Order=1, Mounting Type="Through Hole", Number of Positions=9, Number of Positions Loaded=All, Number of Rows=1, Overall Contact Length="0.331\" (8.40mm)", Packaging=Bulk, Part Number=NRPN091PAEN-RC, Part Status=Active, PartId=136, Pitch - Mating="0.079\" (2.00mm)", Price=0.27, Row Spacing - Mating="-40°C ~ 105°C", Series=-, Shrouding=Unshrouded, Style="Board to Board or Cable", Supplier 1=DigiKey, Termination=Solder
L1 L2: library part LQW15AN22NG80D, "FIXED IND 22NH 780MA 202MOHM SMD", Current Rating (Amps)="780 mA", DC Resistance (DCR)="202mOhm Max", Device Package="0402 (1005 Metric)", Frequency - Self Resonant=4.5GHz, Inductance Frequency - Test="100 MHz", Manufacturer="Murata Electronics", Operating Temperature="-55°C ~ 125°C", Q @ Freq="30 @ 250MHz", Supplier Part Number 1=490-7628-1-ND, Tolerance=±2%, ComponentLink1Description=Datasheet, ComponentLink1URL=https://search.murata.co.jp/Ceramy/image/img/P02/JELF243A-0100.pdf, ComponentLink2Description="DigiKey Link", ComponentLink2URL=https://www.digikey.com/en/products/detail/murata-electronics/LQW15AN22NG80D/4292341, Height - Seated (Max)="0.024\" (0.60mm)", Inductance="22 nH", LastUpdated="27/06/2022 11:51:12", Lifecycle Status=Active, Material - Core=Non-Magnetic, Minimum Order=1, Mounting Type="Surface Mount", Package / Case="0402 (1005 Metric)", Packaging=TapeAndReel, Part Number=LQW15AN22NG80D, Part Status=Active, PartId=350, Price=0.08, Series=LQW15, Shielding=Unshielded, Size / Dimension="0.039\" L x 0.024\" W (1.00mm x 0.60mm)", Supplier 1=DigiKey, Type=Wirewound
R1 R3 R23 R29: library part RG1005P-151-B-T5, "RES SMD 150 OHM 0.1% 1/16W 0402", Device Package="0402 (1005 Metric)", Manufacturer=Susumu, Operating Temperature="-55°C ~ 155°C", Power (Watts)="0.063W, 1/16W", Ratings=AEC-Q200, Supplier Device Package=0402, Supplier Part Number 1=RG10P150BCT-ND, Temperature Coefficient=±25ppm/°C, Tolerance=±0.1%, ComponentLink1Description=Datasheet, ComponentLink1URL=http://www.susumu.co.jp/common/pdf/n_catalog_partition01_en.pdf, ComponentLink2Description="DigiKey Link", ComponentLink2URL=https://www.digikey.com/en/products/detail/susumu/RG1005P-151-B-T5/968732, Composition="Thin Film", Features="Anti-Sulfur, Automotive AEC-Q200", Height - Seated (Max)="0.016\" (0.40mm)", LastUpdated="27/06/2022 11:16:36", Lifecycle Status=Active, Minimum Order=1, Number of Terminations=2, Package / Case="0402 (1005 Metric)", Packaging=TapeAndReel, Part Number=RG1005P-151-B-T5, Part Status=Active, PartId=7627, Price=0.06, Resistance="150 Ohms", Series=RG, Size / Dimension="0.039\" L x 0.020\" W (1.00mm x 0.50mm)", Supplier 1=DigiKey
R2 R9 R22 R30 R33: library part RT0402BRD07348RL, "RES SMD 348 OHM 0.1% 1/16W 0402", Device Package="0402 (1005 Metric)", Manufacturer=Yageo, Operating Temperature="-55°C ~ 155°C", Power (Watts)="0.063W, 1/16W", Supplier Device Package=0402, Supplier Part Number 1=YAG4245CT-ND, Temperature Coefficient=±25ppm/°C, Tolerance=±0.1%, ComponentLink1Description=Datasheet, ComponentLink1URL=https://www.yageo.com/upload/media/product/productsearch/datasheet/rchip/PYu-RT_1-to-0.01_RoHS_L_11.pdf, ComponentLink2Description="DigiKey Link", ComponentLink2URL=https://www.digikey.com/en/products/detail/yageo/RT0402BRD07348RL/1069221, Composition="Thin Film", Height - Seated (Max)="0.014\" (0.35mm)", LastUpdated="28/06/2022 17:11:53", Lifecycle Status=Active, Minimum Order=1, Number of Terminations=2, Package / Case="0402 (1005 Metric)", Packaging=TapeAndReel, Part Number=RT0402BRD07348RL, Part Status=Active, PartId=4531, Price=0.04, Resistance="348 Ohms", Series=RT, Size / Dimension="0.039\" L x 0.020\" W (1.00mm x 0.50mm)", Supplier 1=DigiKey
R4 R5 R6 R7 R8 R24 R25 R26 R27 R28: library part RNCS1206BKE1M00, "RES 1M OHM 0.1% 1/8W 1206", Device Package="1206 (3216 Metric)", Manufacturer="Stackpole Electronics Inc", Operating Temperature="-55°C ~ 155°C", Power (Watts)="0.125W, 1/8W", Ratings=AEC-Q200, Supplier Device Package=1206, Supplier Part Number 1=RNCS1206BKE1M00CT-ND, Temperature Coefficient=±25ppm/°C, Tolerance=±0.1%, ComponentLink1Description=Datasheet, ComponentLink1URL=https://www.seielect.com/catalog/sei-rncs_rnch.pdf, ComponentLink2Description="DigiKey Link", ComponentLink2URL=https://www.digikey.com/en/products/detail/stackpole-electronics-inc/RNCS1206BKE1M00/1801448, Composition="Thin Film", Features="Anti-Corrosive, Automotive AEC-Q200, Moisture Resistant", Height - Seated (Max)="0.026\" (0.65mm)", LastUpdated="27/06/2022 11:30:14", Lifecycle Status=Active, Minimum Order=1, Number of Terminations=2, Package / Case="1206 (3216 Metric)", Packaging=TapeAndReel, Part Number=RNCS1206BKE1M00, Part Status=Active, PartId=33934, Price=0.09, Resistance="1 MOhms", Series=RNCS, Size / Dimension="0.120\" L x 0.061\" W (3.05mm x 1.55mm)", Supplier 1=DigiKey
R10 R11 R31 R32: library part RN73R1ETTP1502B25, "RES 15K OHM 0.1% 1/16W 0402", Device Package="0402 (1005 Metric)", Manufacturer="KOA Speer Electronics, Inc.", Operating Temperature="-55°C ~ 155°C", Power (Watts)="0.063W, 1/16W", Ratings=AEC-Q200, Supplier Device Package=0402, Supplier Part Number 1=2019-RN73R1ETTP1502B25TR-ND, Temperature Coefficient=±25ppm/°C, Tolerance=±0.1%, ComponentLink1Description=Datasheet, ComponentLink1URL=//media.digikey.com/pdf/Data%20Sheets/KOA%20Speer/RN73R_Type_DS.pdf, ComponentLink2Description="DigiKey Link", ComponentLink2URL=https://www.digikey.com/en/products/detail/koa-speer-electronics-inc/RN73R1ETTP1502B25/9991844, Composition="Thin Film", Features="Automotive AEC-Q200, Moisture Resistant", Height - Seated (Max)="0.016\" (0.40mm)", LastUpdated="27/06/2022 11:16:46", Lifecycle Status=Active, Minimum Order=0, Number of Terminations=2, Package / Case="0402 (1005 Metric)", Part Number=RN73R1ETTP1502B25, Part Status=Active, PartId=5317, Price=0, Resistance="15 kOhms", Series=RN73R, Size / Dimension="0.039\" L x 0.020\" W (1.00mm x 0.50mm)", Supplier 1=DigiKey
R12 R21: library part CPF0402B9K1E1, "RES SMD 9.1K OHM 0.1% 1/16W 0402", Device Package="0402 (1005 Metric)", Manufacturer="TE Connectivity Passive Product", Operating Temperature="-55°C ~ 155°C", Power (Watts)="0.063W, 1/16W", Supplier Device Package=0402, Supplier Part Number 1=A103026CT-ND, Temperature Coefficient=±25ppm/°C, Tolerance=±0.1%, ComponentLink1Description=Datasheet, ComponentLink1URL=https://www.te.com/commerce/DocumentDelivery/DDEController?Action=srchrtrv&DocNm=1773200&DocType=DS&DocLang=English, ComponentLink2Description="DigiKey Link", ComponentLink2URL=https://www.digikey.com/en/products/detail/te-connectivity-passive-product/CPF0402B9K1E1/2381827, Composition="Thin Film", Height - Seated (Max)="0.014\" (0.35mm)", LastUpdated="28/06/2022 17:11:48", Lifecycle Status=Active, Minimum Order=1, Number of Terminations=2, Package / Case="0402 (1005 Metric)", Packaging=TapeAndReel, Part Number=CPF0402B9K1E1, Part Status=Active, PartId=5611, Price=0.14, Resistance="9.1 kOhms", Series="CPF, Neohm", Size / Dimension="0.039\" L x 0.020\" W (1.00mm x 0.50mm)", Supplier 1=DigiKey
R13 R34: library part 3386P-1-105LF, "TRIMMER 1M OHM 0.5W PC PIN TOP", Manufacturer="Bourns Inc.", Power (Watts)="0.5W, 1/2W", Resistive Material=Cermet, Supplier Part Number 1=3386P-105LF-ND, Temperature Coefficient=±100ppm/°C, Tolerance=±10%, Adjustment Type="Top Adjustment", ComponentLink1Description=Datasheet, ComponentLink1URL=https://www.bourns.com/docs/Product-Datasheets/3386.pdf, ComponentLink2Description="DigiKey Link", ComponentLink2URL=https://www.digikey.com/en/products/detail/bourns-inc/3386P-1-105LF/1088525, LastUpdated="27/06/2022 12:04:02", Lifecycle Status=Active, Minimum Order=1, Mounting Type="Through Hole", Number of Turns=1, Packaging=Tube, Part Number=3386P-1-105LF, Part Status=Active, PartId=105, Price=0.72, Resistance="1 MOhms", Series="Trimpot® 3386 - Sealed", Size / Dimension="Square - 0.375\" x 0.375\" Face x 0.190\" H (9.53mm x 9.53mm x 4.83mm)", Supplier 1=DigiKey, Termination Style="PC Pins"
R14 R20: library part ERA-2AEB8450X, "RES SMD 845 OHM 0.1% 1/16W 0402", Device Package="0402 (1005 Metric)", Manufacturer="Panasonic Electronic Components", Operating Temperature="-55°C ~ 155°C", Power (Watts)="0.063W, 1/16W", Ratings=AEC-Q200, Supplier Device Package=0402, Supplier Part Number 1=P845DCCT-ND, Temperature Coefficient=±25ppm/°C, Tolerance=±0.1%, ComponentLink1Description=Datasheet, ComponentLink1URL=https://industrial.panasonic.com/cdbs/www-data/pdf/RDM0000/AOA0000C307.pdf, ComponentLink2Description="DigiKey Link", ComponentLink2URL=https://www.digikey.com/en/products/detail/panasonic-electronic-components/ERA-2AEB8450X/2026047, Composition="Thin Film", Features="Automotive AEC-Q200", Height - Seated (Max)="0.016\" (0.40mm)", LastUpdated="28/06/2022 17:11:17", Lifecycle Status=Active, Minimum Order=1, Number of Terminations=2, Package / Case="0402 (1005 Metric)", Packaging=TapeAndReel, Part Number=ERA-2AEB8450X, Part Status=Active, PartId=14335, Price=0.05, Resistance="845 Ohms", Series=ERA-2A, Size / Dimension="0.039\" L x 0.020\" W (1.00mm x 0.50mm)", Supplier 1=DigiKey
R15 R35: library part RT0402BRD07470RL, "RES SMD 470 OHM 0.1% 1/16W 0402", Device Package="0402 (1005 Metric)", Manufacturer=Yageo, Operating Temperature="-55°C ~ 155°C", Power (Watts)="0.063W, 1/16W", Supplier Device Package=0402, Supplier Part Number 1=YAG4268CT-ND, Temperature Coefficient=±25ppm/°C, Tolerance=±0.1%, ComponentLink1Description=Datasheet, ComponentLink1URL=https://www.yageo.com/upload/media/product/productsearch/datasheet/rchip/PYu-RT_1-to-0.01_RoHS_L_11.pdf, ComponentLink2Description="DigiKey Link", ComponentLink2URL=https://www.digikey.com/en/products/detail/yageo/RT0402BRD07470RL/1069287, Composition="Thin Film", Height - Seated (Max)="0.014\" (0.35mm)", LastUpdated="28/06/2022 17:11:18", Lifecycle Status=Active, Minimum Order=1, Number of Terminations=2, Package / Case="0402 (1005 Metric)", Packaging=TapeAndReel, Part Number=RT0402BRD07470RL, Part Status=Active, PartId=13979, Price=0.04, Resistance="470 Ohms", Series=RT, Size / Dimension="0.039\" L x 0.020\" W (1.00mm x 0.50mm)", Supplier 1=DigiKey
R16 R19: library part RT0402BRD0724R9L, "RES SMD 24.9 OHM 0.1% 1/16W 0402", Device Package="0402 (1005 Metric)", Manufacturer=Yageo, Operating Temperature="-55°C ~ 155°C", Power (Watts)="0.063W, 1/16W", Supplier Device Package=0402, Supplier Part Number 1=YAG4216CT-ND, Temperature Coefficient=±25ppm/°C, Tolerance=±0.1%, ComponentLink1Description=Datasheet, ComponentLink1URL=https://www.yageo.com/upload/media/product/productsearch/datasheet/rchip/PYu-RT_1-to-0.01_RoHS_L_11.pdf, ComponentLink2Description="DigiKey Link", ComponentLink2URL=https://www.digikey.com/en/products/detail/yageo/RT0402BRD0724R9L/1069153, Composition="Thin Film", Height - Seated (Max)="0.014\" (0.35mm)", LastUpdated="28/06/2022 17:10:58", Lifecycle Status=Active, Minimum Order=1, Number of Terminations=2, Package / Case="0402 (1005 Metric)", Packaging=TapeAndReel, Part Number=RT0402BRD0724R9L, Part Status=Active, PartId=19431, Price=0.04, Resistance="24.9 Ohms", Series=RT, Size / Dimension="0.039\" L x 0.020\" W (1.00mm x 0.50mm)", Supplier 1=DigiKey
R17: library part 3386P-1-101LF, "TRIMMER 100 OHM 0.5W PC PIN TOP", Manufacturer="Bourns Inc.", Power (Watts)="0.5W, 1/2W", Resistive Material=Cermet, Supplier Part Number 1=3386P-101LF-ND, Temperature Coefficient=±100ppm/°C, Tolerance=±10%, Adjustment Type="Top Adjustment", ComponentLink1Description=Datasheet, ComponentLink1URL=https://www.bourns.com/docs/Product-Datasheets/3386.pdf, ComponentLink2Description="DigiKey Link", ComponentLink2URL=https://www.digikey.com/en/products/detail/bourns-inc/3386P-1-101LF/1088522, LastUpdated="27/06/2022 12:04:02", Lifecycle Status=Active, Minimum Order=1, Mounting Type="Through Hole", Number of Turns=1, Packaging=Tube, Part Number=3386P-1-101LF, Part Status=Active, PartId=114, Price=0.72, Resistance="100 Ohms", Series="Trimpot® 3386 - Sealed", Size / Dimension="Square - 0.375\" x 0.375\" Face x 0.190\" H (9.53mm x 9.53mm x 4.83mm)", Supplier 1=DigiKey, Termination Style="PC Pins"
R18: library part RMCF0402FT1K00, "RES 1K OHM 1% 1/16W 0402", Device Package="0402 (1005 Metric)", Manufacturer="Stackpole Electronics Inc", Operating Temperature="-55°C ~ 155°C", Power (Watts)="0.063W, 1/16W", Ratings=AEC-Q200, Supplier Device Package=0402, Supplier Part Number 1=RMCF0402FT1K00CT-ND, Temperature Coefficient=±100ppm/°C, Tolerance=±1%, ComponentLink1Description=Datasheet, ComponentLink1URL=https://www.seielect.com/catalog/sei-rmcf_rmcp.pdf, ComponentLink2Description="DigiKey Link", ComponentLink2URL=https://www.digikey.com/en/products/detail/stackpole-electronics-inc/RMCF0402FT1K00/1761754, Composition="Thick Film", Features="Automotive AEC-Q200", Height - Seated (Max)="0.016\" (0.40mm)", LastUpdated="28/06/2022 17:10:53", Lifecycle Status=Active, Minimum Order=1, Number of Terminations=2, Package / Case="0402 (1005 Metric)", Packaging=CutTape, Part Number=RMCF0402FT1K00, Part Status=Active, PartId=20544, Price=0.01, Resistance="1 kOhms", Series=RMCF, Size / Dimension="0.039\" L x 0.020\" W (1.00mm x 0.50mm)", Supplier 1=DigiKey
R36 R37: library part CRG0805F390R, "RES SMD 390 OHM 1% 1/8W 0805", Device Package="0805 (2012 Metric)", Manufacturer="TE Connectivity Passive Product", Operating Temperature="-55°C ~ 155°C", Power (Watts)="0.125W, 1/8W", Supplier Device Package=0805, Supplier Part Number 1=A126365CT-ND, Temperature Coefficient=±100ppm/°C, Tolerance=±1%, ComponentLink1Description=Datasheet, ComponentLink1URL=https://www.te.com/commerce/DocumentDelivery/DDEController?Action=srchrtrv&DocNm=1773204&DocType=DS&DocLang=English, ComponentLink2Description="DigiKey Link", ComponentLink2URL=https://www.digikey.com/en/products/detail/te-connectivity-passive-product/CRG0805F390R/2380897, Composition="Thick Film", Height - Seated (Max)="0.026\" (0.65mm)", LastUpdated="20/06/2022 12:21:16", Lifecycle Status=Active, Minimum Order=1, Number of Terminations=2, Package / Case="0805 (2012 Metric)", Packaging=TapeAndReel, Part Number=CRG0805F390R, Part Status=Active, PartId=46128, Price=0.01, Resistance="390 Ohms", Series="CRG, Neohm", Size / Dimension="0.079\" L x 0.049\" W (2.00mm x 1.25mm)", Supplier 1=DigiKey
R38 R39 R40 R41: library part RC1206JR-100RL, "RES 0 OHM JUMPER 1/4W 1206", Device Package="1206 (3216 Metric)", Manufacturer=Yageo, Operating Temperature="-55°C ~ 155°C", Power (Watts)="0.25W, 1/4W", Supplier Device Package=1206, Supplier Part Number 1=13-RC1206JR-100RLCT-ND, Tolerance=Jumper, ComponentLink1Description=Datasheet, ComponentLink1URL=https://www.yageo.com/upload/media/product/productsearch/datasheet/rchip/PYu-RC_Group_51_RoHS_L_11.pdf, ComponentLink2Description="DigiKey Link", ComponentLink2URL=https://www.digikey.com/en/products/detail/yageo/RC1206JR-100RL/13694179, Composition="Thick Film", Features="Moisture Resistant", Height - Seated (Max)="0.026\" (0.65mm)", LastUpdated="29/06/2022 14:19:15", Lifecycle Status=Active, Minimum Order=1, Number of Terminations=2, Package / Case="1206 (3216 Metric)", Packaging=TapeAndReel, Part Number=RC1206JR-100RL, Part Status=Active, PartId=58659, Price=0.01, Resistance="0 Ohms", Series=RC_L, Size / Dimension="0.122\" L x 0.063\" W (3.10mm x 1.60mm)", Supplier 1=DigiKey
TP1 TP2 TP3 TP4 TP5 TP6 TP7 TP8 TP9 TP10 TP11 TP12 TP13 TP14: library part CMP-003-000000-1, Component Type="Standard (No BOM)", Design Item ID="Test Point", Pin Count=1, Source="Test Point.SchLib"

## Free pads (board coordinates)
  round 7.5 hole 3.5: M(8.5,16.5)
  round 0 hole 3.5 unplated: M(58.5,30) M1(58.5,3)

## Via types
v1: diameter 0.45, hole 0.2, Top Layer to Bottom Layer, tented both sides, 207 vias

## Nets (pads, with @x,y where several pads share a name; then routed paths per layer and width w, separated by ;. In a path a pad name is that pad's centre, name@x,y a point inside that pad or via, vN(x,y) a via of type N, cw(c..) or ccw(c..) an arc to the next point about the centre after c; other vN are vias at no path point)
4V8: C1.2 C13.2 C16.2 C30.1 D1.2 D3.2 IC1.1 IC1.8 IC2.1 IC2.8 IC3.1 IC3.8 J1.8 R10.1 R31.1 R37.2 TP14.1 | length 153.2
  Top Layer w0.2: R10.1 v1(35,29) ; v1(37.5,21) D1.2 ; D3.2 v1(45.5,12) ; v1(47,4) R31.1 ; v1(51.25,13.75) 51.17,13.059 51.247,12.848 IC3.1 ; IC3.8 54.166,11.735 54.673,12.718 C16.2 55.213,12.929 v1(55.75,12.75) ; v1(54.25,20.25) 54.129,19.403 54.206,19.192 IC1.1 ; IC1.8 57.124,18.079 57.632,19.062 C1.2 58.172,19.273 v1(58.5,19) ; v1(60.75,9) 60.989,8.855 C13.2 61.362,8.924 61.808,9.882 IC2.8 ; IC2.1 64.589,8.906 64.804,8.692 64.804,7.742 65,7.546 v1(65,7.5) ; C30.1 74.475,15.44 cw(c74.56,15.44) 74.5,15.5 76.756,17.756 ccw(c74.96,19.552) 77.5,19.552 77.5,20.789 cw(c80.04,20.789) 78.244,22.585 79.242,23.582 cw(c80.25,22.574) 79.361,23.689 cw(c80.25,22.574) 79.839,23.94 cw(c80.25,22.574) 80.25,24 ccw(c80.25,25.811) 81.53,24.53 TP14.1 83,26.85 83,28.45 R37.2
  Top Layer w0.5: v1(58.5,19) cw(c59.707,19) 58.853,19.853 59.75,20.75 cw(c60.354,20.146) 60.354,21 61.448,21 cw(c61.448,18.46) 63.244,20.256 68.506,14.994 cw(c66.71,13.198) 69.25,13.198 69.25,12.457 ccw(c70.957,12.457) 69.75,11.25 69.793,11.207 ccw(c71.5,12.914) J1.8
  Top Layer w1: J1.8 71.698,10.5 ccw(c71.698,13.04) 73.494,11.244 73.731,11.481 ccw(c71.935,13.277) 74.475,13.277 C30.1
  Bottom Layer w0.5: v1(35,29) v1(37.5,21) 34.097,4.23 ccw(c35.578,4.23) 35.578,2.75 37,2.75 v1(47,4) ; v1(51.25,13.75) v1(45.5,12) v1(47,4) ; v1(54.25,20.25) v1(58.5,19) ; v1(55.75,12.75) v1(60.75,9) 59.665,5.962 ; J1.8 71.412,10.5 71.412,10.459 v1(65,7.5) 62.759,5.739 cw(c61.512,6.986) 62.428,5.479 cw(c61.512,6.986) 61.512,5.223 60.24,5.223 59.961,5.327 59.959,5.328 cw(c60.136,5.795) 59.665,5.962 ; v1(47,4) 59.665,5.962
-4V8: C9.1 C15.1 C28.1 C31.2 D2.1 D4.1 D5.2 IC1.5 IC2.5 IC3.5 J1.4 R11.2 R32.2 TP13.1 | length 94.6
  Top Layer w0.2: v1(35,4) R32.2 ; v1(37.5,12) D4.1 ; D2.1 v1(45.5,21) ; R11.2 v1(47,29) ; v1(52.25,8) 52.25,8.024 52.738,8.512 C28.1 52.915,8.947 53.342,9.968 IC3.5 ; IC1.5 56.3,16.312 55.874,15.291 C9.1 56.059,14.742 v1(56.5,14.5) ; IC2.5 62.632,11.649 63.174,12.305 C15.1 62.989,12.855 v1(62.75,13) ; C31.2 74.525,19 75.821,20.296 79.15,25.15 TP13.1 D5.2
  Top Layer w1: J1.4 73.268,18.5 ccw(c73.268,20.207) C31.2
  Bottom Layer w0.5: v1(35,4) v1(37.5,12) 37.698,12 ccw(c37.698,14.54) 38.13,12.037 ccw(c37.698,14.54) 39.494,12.744 41,14.25 44.421,18.098 44.756,18.434 ccw(c42.96,20.23) 45.102,18.865 ccw(c42.96,20.23) 45.5,20.23 v1(45.5,21) ; v1(47,29) v1(45.5,21) ; v1(52.25,8) 54.648,12.765 cw(c55.095,12.539) 54.757,12.909 v1(56.5,14.5) ; J1.4 69.302,18.5 ; v1(45.5,21) 48.948,21 cw(c48.948,18.46) 50.744,20.256 v1(56.5,14.5) ; v1(56.5,14.5) cw(c56.368,14.018) 56.501,14.5 61.941,13.013 cw(c61.811,12.53) 62.016,12.986 ccw(c62.25,13.5) 62.445,12.97 cw(c62.616,12.5) 62.615,13 v1(62.75,13) 67.506,17.756 cw(c69.302,15.96) 68.746,18.438 ; 68.746,18.438 cw(c68.986,18) 68.986,18.5 69.302,18.5 ; 68.746,18.438 cw(c69.302,15.96) 69.302,18.5
FB_H: C14.2 IC1.2 IC1.7 L1.1 R15.2 TP2.1 | length 6.4
  Top Layer w0.2: C14.2 52.247,19.874 cw(c52.247,18.849) R15.2 53.334,19.405 53.791,18.834 IC1.2 ; IC1.7 57.316,17.19 58.061,17.118 TP2.1 59.601,16.4 59.88,16.336 L1.1
FB_L: C29.2 IC3.2 IC3.7 L2.1 R35.2 TP5.1 | length 6.7
  Top Layer w0.2: C29.2 49.288,13.53 cw(c49.288,12.505) R35.2 50.376,13.061 50.832,12.49 IC3.2 ; IC3.7 54.358,10.846 54.68,9.868 TP5.1 56.22,9.149 56.449,8.977 L2.1
GND: C1.1 C7.1 C8.2 C9.2 C10.2 C11.1 C12.1 C13.1 C15.2 C16.1 C23.1 C24.2 C25.1 C26.1 C27.2 C28.2 C30.2 C31.1 C32.1 C33.1 D6.2 IC1.9 IC2.9 IC3.9 J1.1 J1.3 J1.5 J1.7 J1.9 pad.M@8.5,16.5 R9.2 R17.2 R18.1 R33.2 R36.2 R39.1 R41.1 TP6.1 TP7.1 TP8.1 TP9.1 TP10.1 TP11.1 TP12.1 | length 91